# EAGLE board TMP112_Breakout (EAGLE 6.5.0)
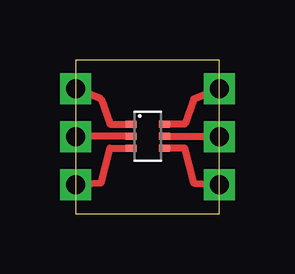
[diagram p0: board, top side]

Size 6 x 6.4 mm. Coordinates in mm from the lower left corner, seen from the top.
Outline: 0,6.4 0,0 6,0 6,6.4 0,6.4
Copper layers (1*16): Top 0.035mm / dielectric 1.5mm / Bottom 0.035mm
Design rules "default": minimum track width 10mil, minimum drill 24mil, track to track 8mil, track to pad 8mil, pad to pad 8mil, via to via 8mil, smd to smd 8mil, copper to edge 40mil, drill to drill 8mil, minimum pad ring 10mil, minimum via ring 8mil, stop-mask expansion 4mil, vias tented up to drill 0mil, thermal gap 10mil

## Footprints (pad centres in the part's own frame; a part is rotated, then mirrored left to right if it is on the bottom)
TMP112 = smd 0.3 x 0.45: 1 -0.5,-0.7; 2 0,-0.7; 3 0.5,-0.7; 4 0.5,0.7; 5 0,0.7; 6 -0.5,0.7
VIA = drill 0.8 pad 1.27 square: P$1 0,0

## Placement (x,y rotation side)
U$1  TMP112  [TMP112]  3.01,3.23 270 top
U$2  VIA  [VIA]  0,5.2 0 top
U$3  VIA  [VIA]  0,3.2 0 top
U$4  VIA  [VIA]  0,1.2 0 top
U$5  VIA  [VIA]  6,5.2 0 top
U$6  VIA  [VIA]  6,3.2 0 top
U$7  VIA  [VIA]  6,1.2 0 top

## Library data of the parts
U$1 = TMP112
U$2-U$7 = via

## Nets
N$1: U$1.1 U$2.P$1
N$2: U$1.2 U$3.P$1
N$3: U$1.3 U$4.P$1
N$4: U$1.6 U$5.P$1
N$5: U$1.5 U$6.P$1
N$6: U$1.4 U$7.P$1

## Tracks (layer width: path | path; a pad name or v marks a point on that pad's centre or on a via)
N$1
  Top 0.254: U$1.1
  Top 0.3: U$1.1 1.43,3.73 1.05,4.79 U$2.P$1
N$2
  Top 0.29: 0,3.23 U$3.P$1
  Top 0.3: U$1.2 0,3.23
N$3
  Top 0.254: U$1.3
  Top 0.3: U$1.3 1.43,2.73 1.05,1.27 U$4.P$1
N$4
  Top 0.254: 3.8,3.73 U$1.6
  Top 0.3: 3.8,3.73 4.55,3.73 4.93,4.79 U$5.P$1
N$5
  Top 0.29: 6,3.23 U$6.P$1
  Top 0.3: U$1.5 6,3.23
N$6
  Top 0.254: 3.8,2.73 U$1.4
  Top 0.3: 3.8,2.73 4.55,2.73 4.93,1.27 U$7.P$1